# Altium PCB GSMBoard_SIM900.PcbDoc
Units mm, origin at the board's own origin, x right, y up, seen from the top; angles counter-clockwise.
Board outline 44 x 44 mm, 2 copper layers (Top Layer, Bottom Layer), stack 1.571 mm thick; 44 components, 39 nets, 225 pads, 41 vias.
Unrouted connection lines stored in the file: 12.
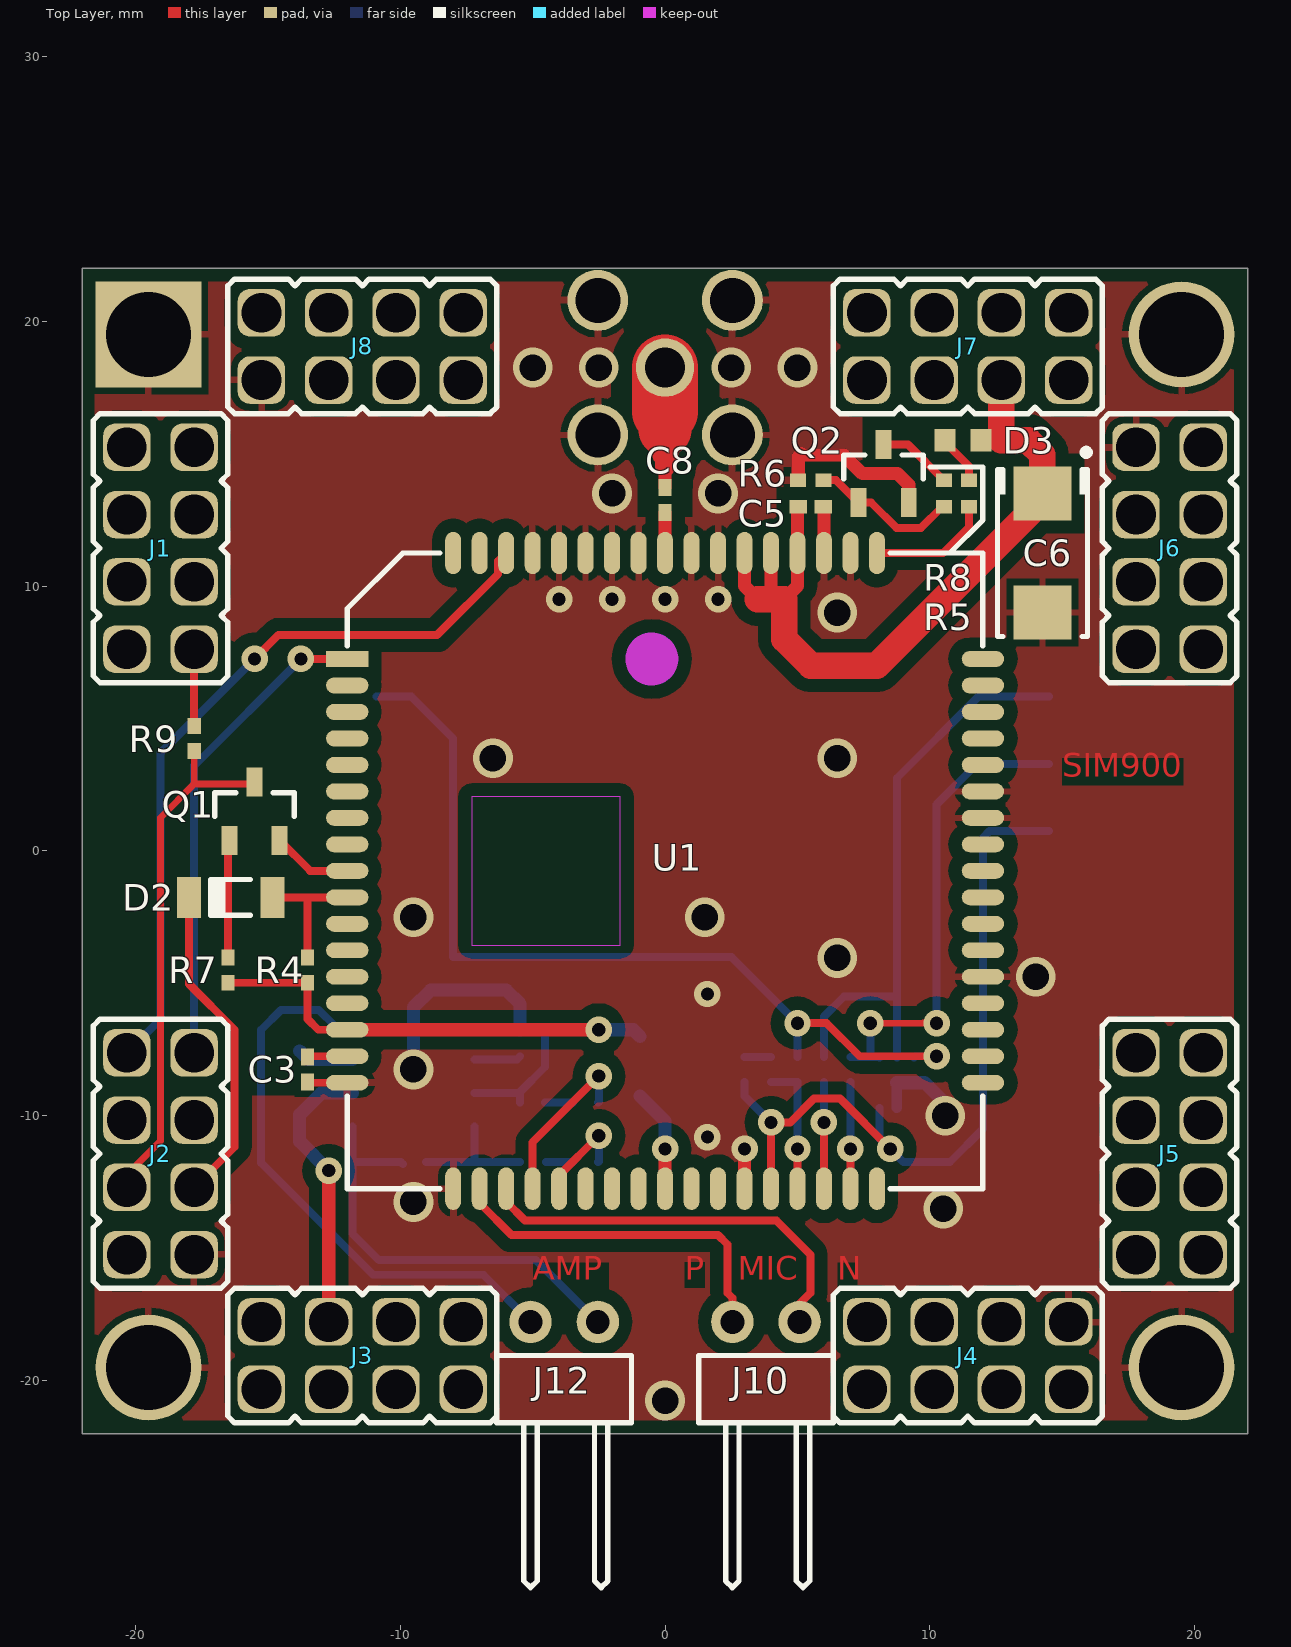
[diagram p0: Top Layer view]
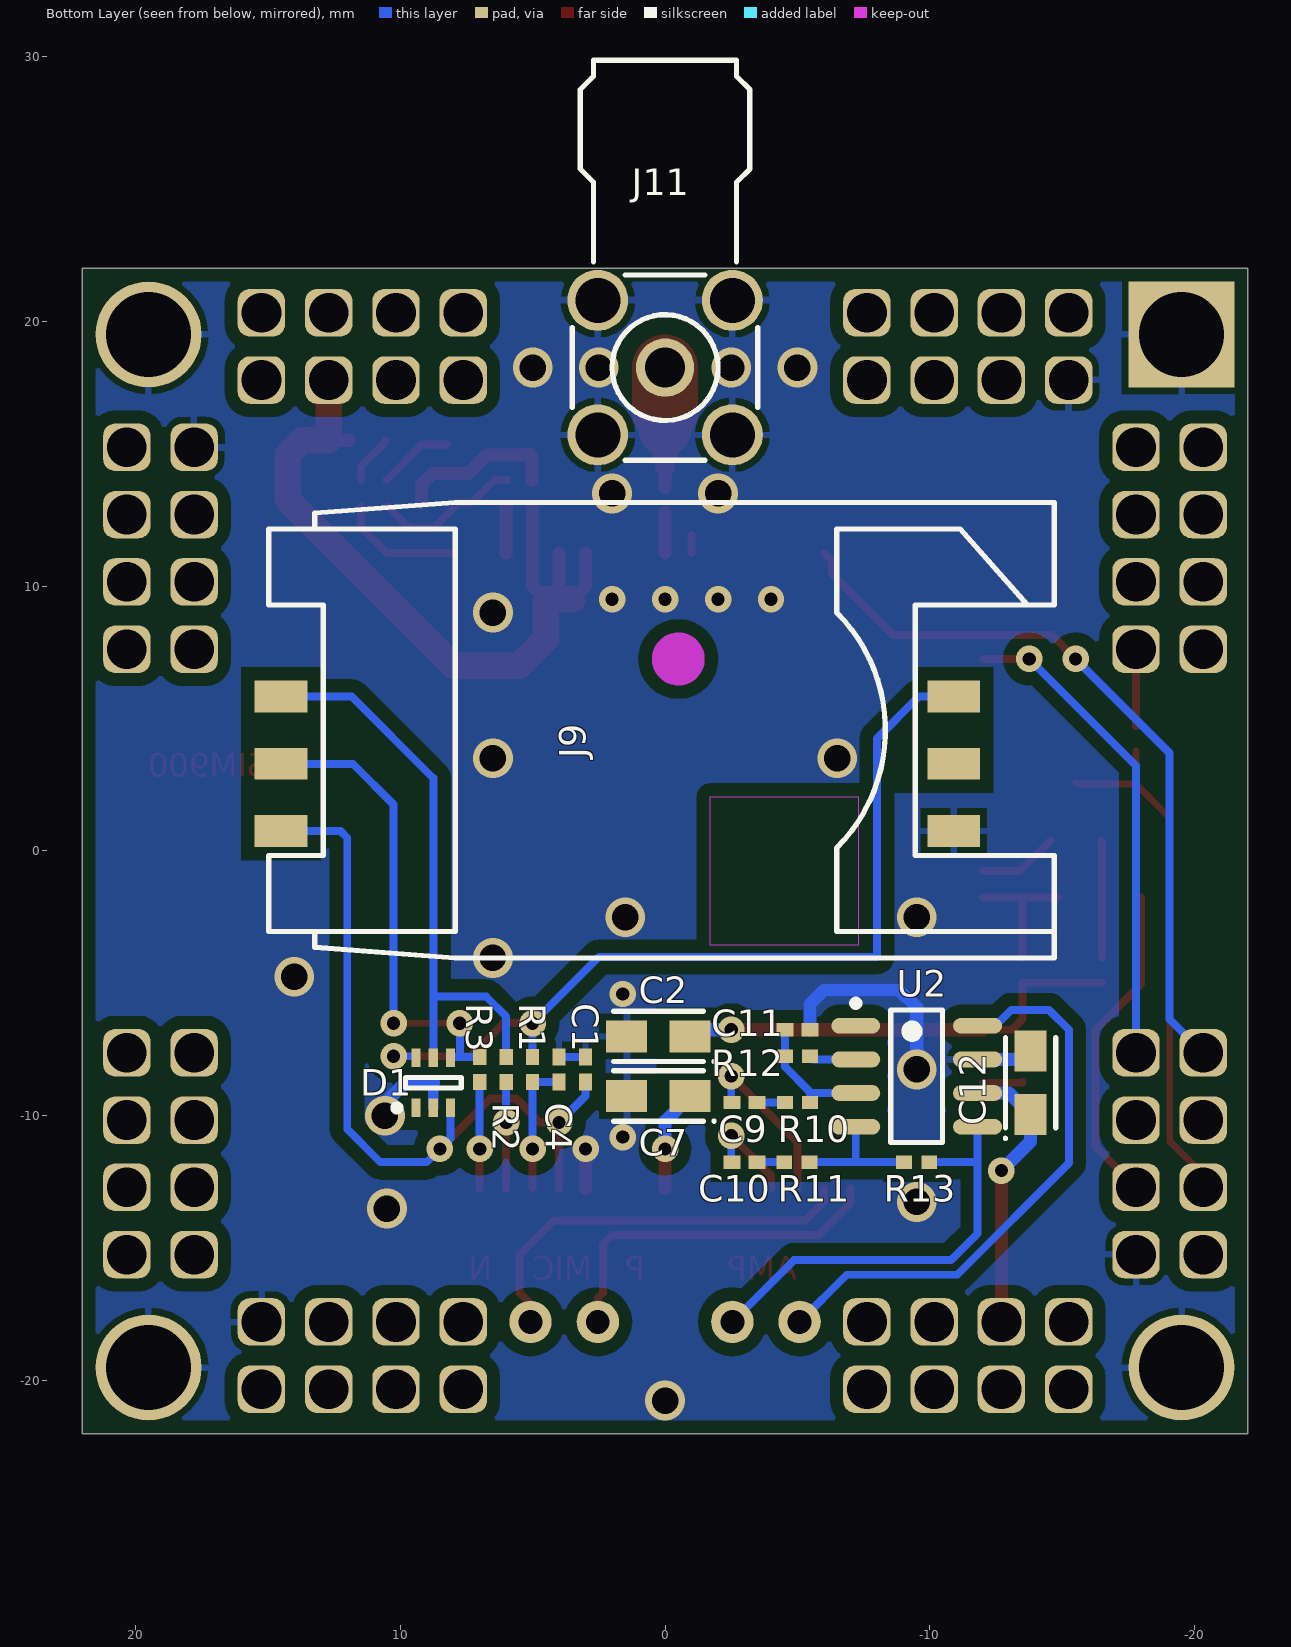
[diagram p1: Bottom Layer view, seen from below]

## Layer stack, top to bottom
Top Solder: solder mask 0.0102, Solder Resist, Dk 3.5
Top Layer: signal copper 0.0356
Dielectric 1: dielectric 1.5, FR-4, Dk 4.8
Bottom Layer: signal copper 0.0356
Bottom Solder: solder mask 0.0102, Solder Resist, Dk 3.5

## Board outline
-22,-22 22,-22 22,22 -22,22

## Design rules (kind name [scope] priority, off if disabled: settings)
Clearance Clearance_Polygon(GND)_Text [InPolygon and InNet('GND') vs IsText] p1: gap=0
Clearance Clearance_ANT_GND [InPolygon and InNet('GND') vs InNet('ANT')] p2: gap=0.8
Clearance Clearance_GND_GND [InPolygon and InNet('GND') vs IsTrack and InNet('GND')] p3: gap=0
Clearance Clearance_Polygon(GND) [InPolygon and InNet('GND')] p4: gap=0.5
Clearance [All] p5: gap=0.25
HoleSize [All] p1: absolutevalues=TRUE maxlimit=4 minlimit=0.3 maxpercent=80.000 minpercent=20.000
PolygonConnect PolygonConnect_Via(GND) [InNet('GND') vs IsVia] p1: connectstyle=Direct reliefconductorwidth=0.254 reliefentries=4 polygonreliefangle="90 Angle" airgapwidth=0.254
PolygonConnect [All] p2: connectstyle=Relief reliefconductorwidth=0.254 reliefentries=4 polygonreliefangle="90 Angle" airgapwidth=0.254
RoutingVias [All] p1: holewidth=0.5 width=1 viastyle="Through Hole" minholewidth=0.5 minwidth=1 maxholewidth=1.5 maxwidth=2
ShortCircuit ShortCircuit_Text_GND [InPolygon and InNet('GND') vs IsText] p1: allowed=TRUE
ShortCircuit [All] p2: allowed=FALSE
SolderMaskExpansion [All] p1: expansion=0.102
Width [All] p1: maxlimit=3 minlimit=0.25 preferedwidth=0.3
27 further rules are at their usual default settings.

## Components (designator, comment, footprint, x,y, rotation, side; value= is the part's Value field where it differs from the comment)
C1 "0.1/25" CAP0402 3,-8.25 r270 bottom
C2 "10/6.3" SMA 0.25,-7 r0 bottom
C3 "0.1/25" CAP0402 -13.5,-8.25 r90 top
C4 "22/25" CAP0402 4,-8.25 r270 bottom
C5 "0.1/25" CAP0402 5.5,13 r180 top
C6 "220/6.3" SMC 14.25,11.25 r270 top
C7 "10/6.3" SMA 0.25,-9.25 r0 bottom
C8 "100/25" CAP0402 0,13.25 r90 top
C9 "1.0/25" CAP0402 -3,-9.5 r180 bottom
C10 "1.0/25" CAP0402 -3,-11.75 r180 bottom
C11 "1.0/25" CAP0402 -5,-6.75 r0 bottom
C12 "10/6.3" SMA -13.8,-8.75 r90 bottom
D1 "SMF05C" SOT363 8.75,-8.75 r90 bottom
D2 "LL4148" SOD80 -16.4,-1.75 r0 top
D3 "L-C191" LED0603 11.25,15.5 r0 top
J1 "LEFT" PBDM-8 -19.05,11.43 r270 top
J2 "LEFT" PBDM-8 -19.05,-11.43 r270 top
J3 "BOTTOM" PBDM-8 -11.43,-19.05 r0 top
J4 "BOTTOM" PBDM-8 11.43,-19.05 r0 top
J5 "RIGHT" PBDM-8 19.05,-11.43 r90 top
J6 "RIGHT" PBDM-8 19.05,11.43 r90 top
J7 "TOP" PBDM-8 11.43,19.05 r180 top
J8 "TOP" PBDM-8 -11.43,19.05 r180 top
J9 "SIM0424" SIM0424 14.5,4.56 r0 bottom
J10 "MIC" PLS-2R 3.81,-17.78 r0 top
J11 "SMA-F/A" SMA-F/A 0,18.25 r180 bottom
J12 "SPEAKER" PLS-2R -3.81,-17.78 r0 top
Q1 "BC846" SOT23 -15.5,1.5 r90 top
Q2 "BC846" SOT23 8.25,14.25 r90 top
R1 "22" RES0402 5,-8.25 r90 bottom
R2 "22" RES0402 6,-8.25 r90 bottom
R3 "22" RES0402 7,-8.25 r90 bottom
R4 "10k" RES0402 -13.5,-4.5 r90 top
R5 "4.7k" RES0402 11,13 r0 top
R6 "47k" RES0402 5.5,14 r180 top
R7 "1k" RES0402 -16.5,-4.5 r90 top
R8 "1k" RES0402 11,14 r180 top
R9 "10k" RES0402 -17.78,4.25 r270 top
R10 "5.6k" RES0402 -5,-9.5 r0 bottom
R11 "5.6k" RES0402 -4.975,-11.75 r0 bottom
R12 "22k" RES0402 -5,-7.75 r0 bottom
R13 "22k" RES0402 -9.5,-11.75 r0 bottom
U1 "SIM900R" SIM900_quad68 -12,7.25 r0 top
U2 "LM4862" SO8 -9.5,-8.505 r180 bottom

## Footprints (in the part's own frame and the unit in brackets; to place one, negate y for a bottom-side part, rotate by r counter-clockwise, add the part's x,y. Pads: shape width x height; smd on the part's side, far side on the other; paste and mask are expansions set on the pad)
CAP0402 [mm]
  rect 0.65x0.5 smd: 1(-0.475,0) 2(0.475,0)
  body extent -0.55,-0.3 0.55,0.3, height 0.5
LED0603 [mm]
  rect 0.8x0.85 smd: 1(-0.675,0) 2(0.675,0)
  body extent -0.8,-0.4 0.8,0.4, height 0.59
PBDM-8 [mm] "5-pin interboard connector, pitch 2.54 mm"
  rrect50% 1.79x1.79 hole 1.5: 1(-3.81,-1.27) 2(-3.81,1.27) 3(-1.27,-1.27) 4(-1.27,1.27) 5(1.27,-1.27) 6(1.27,1.27) 7(3.81,-1.27) 8(3.81,1.27)
  silkscreen extent -5.08,-2.54 5.08,2.54, body extent -5.08,-2.54 5.08,2.54, height 3
PLS-2R [mm] "2-pin angle interboard connector, pitch 2.54 mm"
  round 1.6 hole 0.9: 1(-1.27,0) 2(1.27,0)
  silkscreen extent -2.54,-10.03 2.54,-1.27, body extent -2.54,-9.91 2.54,0.31, height 2.44
RES0402 [mm]
  rect 0.6x0.5 smd: 1(-0.475,0) 2(0.475,0)
  body extent -0.53,-0.28 0.53,0.28, height 0.35
SIM0424 [mm] "6-pin SIM card holder"
  rect 2x1.2 smd: 1(0,3.81) 2(0,1.27) 3(0,-1.27) 4(-25.4,3.81) 5(-25.4,1.27) 6(-25.4,-1.27)
  silkscreen extent -29.19,-8.6 0.46,8.6, body extent -29.2,-8.6 0.38,8.6, height 2.5
SIM900_quad68 [mm] "SIM900 68-pin SoP"
  rect 1.6x0.6 smd: 1(0,0)
  oval 1.6x0.6 smd: 2(0,-1) 3(0,-2) 4(0,-3) 5(0,-4) 6(0,-5) 7(0,-6) 8(0,-7) 9(0,-8) 10(0,-9) 11(0,-10) 12(0,-11) 13(0,-12) 14(0,-13) 15(0,-14) 16(0,-15) 17(0,-16) 35(24,-16) 36(24,-15) 37(24,-14) 38(24,-13) 39(24,-12) 40(24,-11) 41(24,-10) 42(24,-9) 43(24,-8) 44(24,-7) 45(24,-6) 46(24,-5) 47(24,-4) 48(24,-3) 49(24,-2) 50(24,-1) 51(24,0)
  oval 0.6x1.6 smd: 18(4,-20) 19(5,-20) 20(6,-20) 21(7,-20) 22(8,-20) 23(9,-20) 24(10,-20) 25(11,-20) 26(12,-20) 27(13,-20) 28(14,-20) 29(15,-20) 30(16,-20) 31(17,-20) 32(18,-20) 33(19,-20) 34(20,-20) 52(20,4) 53(19,4) 54(18,4) 55(17,4) 56(16,4) 57(15,4) 58(14,4) 59(13,4) 60(12,4) 61(11,4) 62(10,4) 63(9,4) 64(8,4) 65(7,4) 66(6,4) 67(5,4) 68(4,4)
  Keep-Out Layer circle w1: c11.5,0 r0.5
  Keep-Out Layer region: 4.7,-10.8 10.3,-10.8 10.3,-5.2 4.7,-5.2
  silkscreen extent 0,-20 24,4, body extent 0,-20 24,4, height 3
SMA [mm] "Surface mount package, size A"
  rect 1.55x1.2 smd: 1(1.2,0) 2(-1.2,0)
  silkscreen extent -2.15,-0.95 1.7,1, body extent -1.6,-0.8 1.6,0.8, height 1.8
SMA-F/A [mm] "Angle SMA female connector"
  round 2.2 hole 1.5: 1(0,0)
  round 2.3 hole 1.7: 2(-2.54,-2.54) 2(-2.54,2.54) 2(2.54,-2.54) 2(2.54,2.54)
  silkscreen extent -3.5,-3.5 3.5,11.6, body extent -3.5,-3.5 3.5,11.6, height 10
SMC [mm] "Surface mount package, size C"
  rect 2.05x2.2 smd: 1(2.25,0) 2(-2.25,0)
  silkscreen extent -3.92,-1.7 3.15,1.78, body extent -3,-1.6 3,1.6, height 2.8
SO8 [mm] "SOIC, 8-Leads, Body 4,90x3,90mm, Pitch 1,27mm, IPC High Density"
  oval 1.85x0.6 smd: 1(-2.3,1.905) 2(-2.3,0.635) 3(-2.3,-0.635) 4(-2.3,-1.905) 5(2.3,-1.905) 6(2.3,-0.635) 7(2.3,0.635) 8(2.3,1.905)
  silkscreen extent -2.43,-2.5 0.97,2.88, body extent -3,-2.54 3,2.54, height 1.7
SOD80 [mm]
  rect 0.9x1.55 smd: 1(-1.575,0) 2(1.575,0)
  silkscreen extent -0.75,-0.67 0.75,0.68, body extent -1.85,-0.8 1.85,0.8, height 1.61
SOT23 [mm]
  rect 1.1x0.6 smd: 1(-1.1,0.95) 2(-1.1,-0.95) 3(1.1,0)
  silkscreen extent -0.2,-1.5 0.7,1.5, body extent -1.15,-1.5 1.15,1.5, height 1.1
SOT363 [mm] "SOT363 also known as SC-70 6L, SC-88"
  rect 0.7x0.35 smd: 1(-0.95,0.65) 2(-0.95,0) 3(-0.95,-0.65) 4(0.95,-0.65) 5(0.95,0) 6(0.95,0.65)
  silkscreen extent -1.07,-1.05 0.2,1.5, body extent -0.67,-1.05 0.67,1.05, height 1.1

## Part data
C1 C3 C4 C5 C8 C9 C10 C11: library part CAP0402, "Ceramic chip capacitor 0402"
C2 C7 C12: library part TAJA, "Standard tantalum SMT capacitor, size A"
C6: library part TAJC, "Standard tantalum SMT capacitor, size C"
D1: "5-line TVS Array for ESD and Latch-Up Protection"
D2: "Small Signal Diode"
D3: "SMD LED, size 0603"
J1 J2 J3 J4 J5 J6 J7 J8: library part PBDM-8, "2x4-pin header, pitch 2.54 mm"
J9: "6-pin SIM card holder"
J10 J12: library part PLS-2R, "2-pin angle header, pitch 2.54 mm"
J11: "Angle SMA female connector"
Q1 Q2: "NPN Silicon AF Transistor"
R1 R2 R3 R4 R5 R6 R7 R8 R9 R10 R11 R12 R13: library part RES0402, "Ceramic chip resistor"
U1: "GSM module; 2G; 1800MHz,900MHz; 85.6kbps; I2C, UART; 3.4A@4.5VDC"
U2: "Audio Power Amplifier with Shutdown Mode"

## Free pads (board coordinates)
  round 4 hole 3.2: 0(-19.5,-19.5) 0(19.5,-19.5) 0(19.5,19.5)
  rect 4x4 hole 3.2: 0(-19.5,19.5)

## Via types
v1: diameter 1, hole 0.5, Top Layer to Bottom Layer, 23 vias
v2: diameter 1.5, hole 1, Top Layer to Bottom Layer, 18 vias

## Nets (pads, with @x,y where several pads share a name; then routed paths per layer and width w, separated by ;. In a path a pad name is that pad's centre, name@x,y a point inside that pad or via, vN(x,y) a via of type N, cw(c..) or ccw(c..) an arc to the next point about the centre after c; other vN are vias at no path point)
+5V: J1.6 J3.6 J5.6 J7.6
+12V: J1.2 J3.2 J5.2 J7.2
ANT: C8.2 J11.1 | length 4.5
  Top Layer w0.5: C8.2 0,14.5
  Top Layer w0.75: 0,14.5 0,15
  Top Layer w1: 0,15 0,15.9
  Top Layer w2: 0,15.9 0,16.6
  Top Layer w2.5: 0,16.6 J11.1
GND: C1.1 C2.1 C3.1 C4.1 C5.1 C6.1 C7.1 C11.1 C12.1 D1.2 J2.8 J4.8 J6.8 J8.8 J9.4 J11.2 pad.0 Q2.2 R6.2 U1.17 U1.18 U1.29 U1.39 U1.45 U1.46 U1.53 U1.54 U1.58 U1.59 U1.61 U1.62 U1.63 U1.64 U1.65 U2.7 | length 27.6
  Top Layer w0.3: C3.1 -13.475,-8.75 U1.17 ; U1.61 U1.61@-1,11.92
  Top Layer w0.5: U1.29 v1(3,-11.25) ; R6.2 5.025,14.877 5.152,15.004 5.206,14.95 6.75,14.95 7.45,14.25 8.777,14.25 9.2,13.827 Q2.2 ; C5.1 6,12.975 U1.54
  Bottom Layer w0.3: v2(-9.5,-13.25) -9.25,-13.25 -9,-13 v2@-9,-13.25 ; C1.1 C4.1 ; v2@10.25,-10.5 v2@10.575,-10.175
  Bottom Layer w0.4: D1.2 8.75,-8.75
  Bottom Layer w0.5: C12.1 -13.48,-7.87 U2.7 ; v2(-9.5,-8.25) -9.5,-5.9 -8.85,-5.25 -6,-5.25 -5.475,-5.775 C11.1 ; 8.75,-8.75 9.8,-8.75 10.575,-9.525 v2(10.575,-10)
  other v1: 1.6,-10.8 1.6,-5.4 -4,9.5 -2,9.5 0,9.5 2,9.5
  other v2: 0,-20.75 10.5,-13.5 14,-4.75 6.5,-4.04 -9.5,-2.5 1.5,-2.5 -6.5,3.5 6.5,3.5 6.5,9 -2,13.5 2,13.5 -5,18.25 -2.5,18.25 2.5,18.25 5,18.25
GSM_POWERKEY: J2.2 U1.1 | length 18.3
  Top Layer w0.3: v1(-13.75,7.25) U1.1
  Bottom Layer w0.3: J2.2 -17.78,3.22 v1(-13.75,7.25)
GSM_RXD: D2.1 J2.6 | length 12.3
  Top Layer w0.3: D2.1 -17.975,-5.025 -16.25,-6.75 -16.25,-11.17 J2.6
GSM_STATUS: J2.1 U1.66 | length 28.3
  Top Layer w0.3: v1(-15.5,7.25) -14.6,8.15 -8.61,8.15 -6.3,10.46 -6.3,10.95 U1.66
  Bottom Layer w0.3: J2.1 -19.05,-6.35 -19.05,3.7 v1(-15.5,7.25)
GSM_TXD: J2.5 Q1.3 R9.2 | length 19.8
  Top Layer w0.25: J2.5 -20.32,-12.218 -19.05,-10.948 -19.05,1.258 -17.78,2.528 ; R9.2 -17.78,2.528 ; Q1.3 -15.572,2.528 -17.78,2.528
MIC_N: J10.2 U1.20 | length 15.5
  Top Layer w0.3: U1.20 -6,-13.24 -5.29,-13.95 4.2,-13.95 5.494,-15.244 5.494,-16.683 5.08,-17.097 J10.2
MIC_P: J10.1 U1.19 | length 13.6
  Top Layer w0.3: U1.19 -7,-13.3 -5.8,-14.5 2,-14.5 2.35,-14.85 2.35,-16.683 2.54,-16.873 J10.1
NetC1_2: C1.2 D1.3 J9.1 U1.30 | length 29.6
  Top Layer w0.3: U1.30 v1(4,-10.25) 4.727,-10.25 5.627,-9.35 6.6,-9.35 v1(8.5,-11.25)
  Bottom Layer w0.3: C1.2 3,-9.25 v1(4,-10.25) ; D1.3 8.1,-10.85 v1(8.5,-11.25) 9,-11.75 10.75,-11.75 12,-10.5 12,0.5 12.25,0.75 J9.1
NetC3_2: C3.2 U1.16 | length 1.5
  Top Layer w0.3: C3.2 -13.475,-7.75 U1.16
NetC4_2: C4.2 R1.1 U1.31 | length 5
  Top Layer w0.3: U1.31 v1(5,-11.25)
  Bottom Layer w0.3: C4.2 R1.1 v1(5,-11.25)
NetC7_2: C7.2 U1.26 | length 3.9
  Top Layer w0.5: U1.26 v1(0,-11.25)
  Bottom Layer w0.5: C7.2 0,-10.2 v1(0,-11.25)
NetC8_1: C8.1 U1.60 | length 1.5
  Top Layer w0.5: U1.60 C8.1
NetC9_2: C9.2 R10.2 | length 1.1
  Bottom Layer w0.3: R10.2 C9.2
NetC10_2: C10.2 R11.2 | length 1
  Bottom Layer w0.3: R11.2 C10.2
NetC11_2: C11.2 R10.1 R12.2 U2.3 | length 4.9
  Bottom Layer w0.3: U2.3@-7.2,-9.135 -5.51,-9.135 -5.475,-9.1 ; R10.1 -5.475,-9.1 ; C11.2 R12.2 -4.525,-8.15 -5.475,-9.1
NetD1_4: D1.4 J9.2 R3.2 | length 18
  Top Layer w0.25: v1(7.75,-6.5) 9.732,-6.5 9.75,-6.482 9.768,-6.5 v1(10.25,-6.5)
  Bottom Layer w0.3: R3.2 7.75,-7.775 ; v1(7.75,-6.5) 7.75,-7.775 ; D1.4 8.075,-7.775 7.75,-7.775 ; v1(10.25,-6.5) 10.25,1.75 11.79,3.29 J9.2
NetD1_5: D1.5 J9.3 R2.2 | length 22.2
  Bottom Layer w0.3: R2.2 6,-6.25 6.75,-5.5 8.75,-5.5 ; D1.5 8.75,-5.5 ; J9.3 11.83,5.83 8.75,2.75 8.75,-5.5
NetD1_6: D1.6 J9.6 R1.2 | length 33.8
  Top Layer w0.3: v1(5,-6.5) 6.1,-6.5 7.35,-7.75 v1(10.25,-7.75)
  Bottom Layer w0.3: J9.6 -9.58,5.83 -8,4.25 -8,-4 2.5,-4 v1(5,-6.5) R1.2 ; D1.6 9.45,-7.75 v1(10.25,-7.75)
NetD2_2: D2.2 R4.2 U1.10 | length 5.1
  Top Layer w0.3: D2.2 -13.5,-1.75 ; R4.2 -13.5,-1.75 ; U1.10 -13.5,-1.75
NetD3_1: D3.1 R8.1 | length 1.9
  Top Layer w0.3: D3.1 10.575,15.425 11.475,14.525 R8.1
NetJ12_1: J12.1 U2.8 | length 21.7
  Bottom Layer w0.3: U2.8 -12.475,-6.6 -13.075,-6 -14.5,-6 -15.25,-6.75 -15.25,-11.778 -11.028,-16 -6.86,-16 J12.1
NetJ12_2: J12.2 R13.1 U2.5 | length 16.6
  Bottom Layer w0.3: U2.5@-11.8,-10.405 -11.8,-11.75 ; R13.1@-9.9,-11.825 R13.1 -11.8,-11.75 ; J12.2 -4.87,-15.45 -10.8,-15.45 -11.8,-14.45 -11.8,-11.75
NetQ1_1: Q1.1 R7.2 | length 4.4
  Top Layer w0.3: R7.2 -16.5,0.35 Q1.1
NetQ1_2: Q1.2 U1.9 | length 3
  Top Layer w0.3: Q1.2 -13.4,-0.75 U1.9
NetQ2_1: Q2.1 R5.1 R6.1 | length 5.6
  Top Layer w0.3: R6.1 6.45,14 Q2.1 7.784,13.15 8.734,12.2 9.666,12.2 10.466,13 R5.1
NetQ2_3: Q2.3 R8.2 | length 2.8
  Top Layer w0.3: Q2.3 9.175,15.35 R8.2
NetR2_1: R2.1 U1.32 | length 4
  Top Layer w0.3: U1.32 v1(6,-10.25)
  Bottom Layer w0.3: v1(6,-10.25) R2.1
NetR3_1: R3.1 U1.33 | length 4
  Top Layer w0.3: U1.33 v1(7,-11.25)
  Bottom Layer w0.3: v1(7,-11.25) R3.1
NetR5_2: R5.2 U1.52 | length 4.7
  Top Layer w0.3: U1.52 10.5,11.25 11.475,12.225 R5.2
NetR11_1: R11.1 R13.2 U2.4 | length 4.9
  Bottom Layer w0.3: R13.2 -7.2,-11.75 ; U2.4@-7.2,-10.405 -7.2,-11.75 ; R11.1@-5.475,-11.75 -7.2,-11.75
NetR12_1: R12.1 U2.2 | length 1.8
  Bottom Layer w0.3: U2.2@-7.2,-7.865 -5.59,-7.865 R12.1
SPK_N: C10.1 U1.22 | length 3.6
  Top Layer w0.3: U1.22 -4,-12.25 v1(-2.5,-10.75)
  Bottom Layer w0.3: C10.1 -2.5,-11.725 v1(-2.5,-10.75)
SPK_P: C9.1 U1.21 | length 6.3
  Top Layer w0.3: U1.21 -5,-11 v1(-2.5,-8.5)
  Bottom Layer w0.3: C9.1 -2.5,-9.475 v1(-2.5,-8.5)
VBAT: C5.2 C6.2 C12.2 D3.2 J1.4 J3.4 J5.4 J7.4 U1.55 U1.56 U1.57 U2.6 | length 39.8
  Top Layer w0.5: J3.4 v1(-12.7,-12.065) ; U1.57 3,10 3.5,9.5 ; 4,9.5 U1.56 ; 4.5,9.5 5,10 U1.55 5,12.975 C5.2 ; D3.2 12.7,15.5
  Top Layer w1: 3.5,9.5 4,9.5 4.5,9.5 4.5,8 5.5,7 8,7 14.25,13.25 C6.2 14.25,14.96 13.71,15.5 12.7,15.5 J7.4
  Bottom Layer w0.5: v1(-12.7,-12.065) -13.8,-10.965 C12.2 -12.99,-9.14 U2.6
VCC: J1.8 J3.8 J5.8 J7.8 R9.1 | length 2.9
  Top Layer w0.3: R9.1 J1.8
VEXT: C2.2 R4.1 R7.1 U1.15 | length 17.2
  Top Layer w0.3: R7.1 R4.1 -13.5,-6.345 -13.095,-6.75 U1.15
  Top Layer w0.5: U1.15 v1(-2.5,-6.75)
  Bottom Layer w0.5: v1(-2.5,-6.75) -1.2,-6.75 C2.2
pads on no net: D1.1 J1.1 J1.3 J1.5 J1.7 J2.3 J2.4 J2.7 J3.1 J3.3 J3.5 J3.7 J4.1 J4.2 J4.3 J4.4 J4.5 J4.6 J4.7 J5.1 J5.3 J5.5 J5.7 J6.1 J6.2 J6.3 J6.4 J6.5 J6.6 J6.7 J7.1 J7.3 J7.5 J7.7 J8.1 J8.2 J8.3 J8.4 J8.5 J8.6 J8.7 J9.5 U1.2 U1.3 U1.4 U1.5 U1.6 U1.7 U1.8 U1.11 U1.12 U1.13 U1.14 U1.23 U1.24 U1.25 U1.27 U1.28 U1.34 U1.35 U1.36 U1.37 U1.38 U1.40 U1.41 U1.42 U1.43 U1.44 U1.47 U1.48 U1.49 U1.50 U1.51 U1.67 U1.68 U2.1

## Polygon pours and split planes (outlines as drawn)
GND on Bottom Layer "Bottom-GND" (solid, remove dead copper, pour order 4): -21.5,21.5 21.5,21.5 21.5,-21.5 -21.5,-21.5
GND on Top Layer "Top-GND" (solid, remove dead copper, pour order 6): -21.524,-21.5 21.476,-21.5 21.476,21.5 -21.524,21.5

## Other copper
Top Layer:
  pour cut-out: 1.5,22 1.5,18.25 -1.5,18.25 -1.5,22
  pour cut-out: -13.25,-9.25 -18.25,-9.25 -18.25,6.5 -13.25,6.5
  text "SIM900" at 15,2.5 h1.52
  text "AMP" at -5,-16.5 h1.52
  text "P" at 0.75,-16.5 h1.52
  text "MIC" at 2.75,-16.5 h1.52
  text "N" at 6.5,-16.5 h1.52
Bottom Layer:
  pour cut-out: -9.75,6.5 -8.656,5.25 -8.656,2.19 -12.4,2.19 -12.4,6.5
  pour cut-out: -3,-6 -3,-9 -3.75,-9 -3.75,-6
  pour cut-out: 16,6.5 16,0 13.5,0 13.5,6.5

## Silkscreen, mask and mechanical layers (free items; w line width, h text height)
Top Overlay:
  lines w0.2: 10,14.5 12,14.5 12,12.5 10.75,11.25
Board:
  the board outline again, w0.2